# EAGLE board espduino (EAGLE 7.1.0)
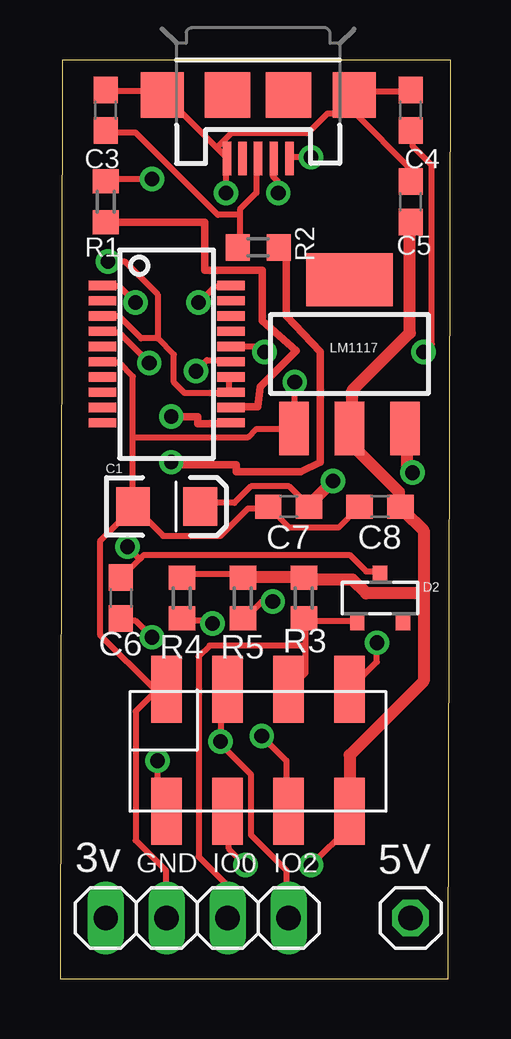
[diagram p0: board, top side]
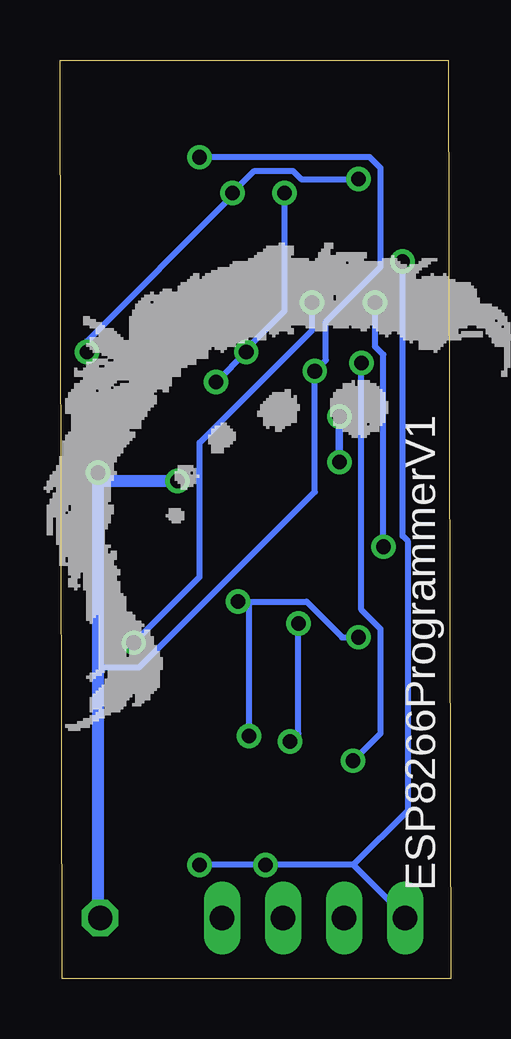
[diagram p1: board, bottom side, seen from below]

Size 16.28 x 38.29 mm. Coordinates in mm from the lower left corner, seen from the top.
Outline: 0,0 16.18,0 16.28,38.29 0.1,38.29 0,0
Copper layers (1*16): Top 0.035mm / dielectric 1.5mm / Bottom 0.035mm
Design rules "default *": minimum track width 10mil, minimum drill 15mil, track to track 8mil, track to pad 8mil, pad to pad 8mil, via to via 8mil, smd to smd 8mil, copper to edge 20mil, drill to drill 7mil, minimum pad ring 10mil, minimum via ring 8mil, stop-mask expansion 4mil, vias tented up to drill 0mil, thermal gap 10mil
Net classes: 1 POWER: width 0.508 mm

## Footprints (pad centres in the part's own frame; a part is rotated, then mirrored left to right if it is on the bottom)
1X01 = drill 1.016 octagon: 1 0,0
EIA3216 = smd 1.4 x 1.6: A 1.4,0; C -1.4,0
C0603 = smd 1.1 x 1: 1 -0.85,0; 2 0.85,0
SOT23-R = smd 0.6 x 0.7: 1 -0.95,-1; 2 0.95,-1; 3 0,1
1X04 = drill 1.016 long: 1 -3.81,0; 2 -1.27,0; 3 1.27,0; 4 3.81,0
SOT223 = smd 1.219 x 2.235: 1 -2.311,-3.099; 2 0,-3.099; 3 2.311,-3.099 | smd 3.6 x 2.2: 4 0,3.099
R0603 = smd 1 x 1.1: 1 -0.85,0; 2 0.85,0
SSOP20_L = smd 0.381 x 1.143: 1 -2.857,-2.68; 2 -2.223,-2.68; 3 -1.587,-2.68; 4 -0.953,-2.68; 5 -0.318,-2.68; 6 0.318,-2.68; 7 0.953,-2.68; 8 1.587,-2.68; 9 2.223,-2.68; 10 2.857,-2.68; 11 2.857,2.68; 12 2.223,2.68; 13 1.587,2.68; 14 0.953,2.68; 15 0.318,2.68; 16 -0.318,2.68; 17 -0.953,2.68; 18 -1.587,2.68; 19 -2.223,2.68; 20 -2.857,2.68
ESP8266-01-HD = smd 1.27 x 2.794: CH_PD 3.81,0; GND 1.27,5.08; GPIO0 6.35,5.08; GPIO2 3.81,5.08; RST 6.35,0; RXD 8.89,5.08; TXD 1.27,0; VCC 8.89,0
USB-MICROB = smd 0.35 x 1.4: D+ 0,2.65; D- -0.65,2.65; GND 1.3,2.65; ID 0.65,2.65; VBUS -1.3,2.65 | smd 1.8 x 1.9: MT1 -4,0; MT2 4,0 | smd 1.9 x 1.9: P$1 -1.27,0; P$2 1.27,0

## Placement (x,y rotation side)
5V  [1X01]  14.61,2.54 0 top
C1  10uF  [EIA3216]  4.45,19.69 0 top
C3  47pF  [C0603]  1.91,36.2 90 top
C4  47pF  [C0603]  14.61,36.2 90 top
C5  0.1uF  [C0603]  14.61,32.38 90 top
C6  0.1uf  [C0603]  2.54,15.88 90 top
C7  0.1uf  [C0603]  9.53,19.69 180 top
C8  0.1uf  [C0603]  13.33,19.69 180 top
D2  [SOT23-R]  13.33,15.88 0 top
ESP8266  [1X04]  5.71,2.54 0 top
LM1117  [SOT223]  12.06,26.04 0 top
R1  27  [R0603]  1.91,32.38 270 top
R2  27  [R0603]  8.26,30.48 180 top
R3  100k  [R0603]  10.16,15.88 90 top
R4  100k  [R0603]  5.08,15.88 90 top
R5  10k  [R0603]  7.62,15.88 90 top
U1  FT231XS  [SSOP20_L]  4.45,26.04 270 top
U$1  ESP8266HEADERS  [ESP8266-01-HD]  3.17,6.98 0 top
U$2  [JUMPER-LOGO]  10.79,23.5 0 top
X1  USB-MICROB  [USB-MICROB]  8.26,36.83 180 top

## Library data of the parts
5V ESP8266 = pinhead
C1 = SparkFun-Passives
C3-C8 R1-R5 = resistor
D2 = adafruit
LM1117 = SparkFun-PowerIC; PROD_ID: VREG-08170
U1 = SparkFun-DigitalIC
U$1 U$2 = jumper-parts
X1 = SparkFun-Connectors; PROD_ID: CONN-09505

## Nets
3.3V: C5.1 C8.1 ESP8266.1 LM1117.2 R3.2 R4.2 R5.2 U1.3 U1.13 U1.14 U$1.CH_PD U$1.VCC
5V: 5V.1 C1.A C7.1 LM1117.3 U1.15 X1.VBUS
CBUS0: U1.18
CBUS3: U1.19
CTS: U1.9
DCD: U1.8
DSR: U1.7
DTR: C6.2 D2.3 U1.1
GND: C1.C C3.2 C4.2 C5.2 C7.2 C8.2 ESP8266.2 LM1117.1 U1.6 U1.16 U$1.GND X1.GND X1.MT1 X1.MT2
GPIO0: D2.1 ESP8266.3 R3.1 U$1.GPIO0
GPIO2: ESP8266.4 R4.1 U$1.GPIO2
N$1: R1.2 U1.12
N$2: R2.1 U1.11
N$3: C3.1 R2.2 X1.D+
N$4: C4.1 R1.1 X1.D-
RESET: C6.1 R5.1 U$1.RST
RI: U1.5
RTS: U1.2
RXD: U1.20 U$1.RXD
TXD: U1.4 U$1.TXD

## Tracks (layer width: path | path; a pad name or v marks a point on that pad's centre or on a via)
3.3V  (via drill 0.61)
  Top 0.254: 7.04,24.41 7.04,25.1 U1.14 | 4.06,26.7 3.38,26.7 2.46,27.61 1.78,27.61 U1.3 | 4.06,26.7 4.75,26.01 4.75,24.87 5.21,24.41 7.04,24.41 | 7.04,24.41 U1.13 | R4.2 5.21,16.87 7.49,16.87 R5.2 | U$1.VCC 12.06,6.35 v10.46,4.75 | v7.72,4.75 7.04,5.44 7.04,6.81 U$1.CH_PD | 4.06,26.7 4.06,28.52 2.69,29.9 v2.01,29.9
  Top 0.508: R5.2 7.84,16.75 10.12,16.75 R3.2 10.35,16.64 12.18,16.64 12.75,16.07 15.15,16.07 | 14.24,19.72 C8.1 | C8.1 14.12,19.95 14.12,20.3 12.06,22.35 LM1117.2 12.18,23.15 12.18,24.52 14.58,26.92 14.58,31.5 C5.1 | U$1.VCC 12.06,9.32 15.15,12.41 15.15,16.07 | 15.15,16.07 15.15,18.69 14.35,19.5 C8.1
  Bottom 0.254: 4.06,4.75 v7.72,4.75 v10.46,4.75 | 4.06,4.75 2.01,2.69 ESP8266.1 | v2.01,29.9 2.01,18.47 1.78,18.24 1.78,7.04 4.06,4.75
5V  (via drill 0.61)
  Top 0.254: v5.66,25.32 6.12,25.78 7.04,25.78 U1.15 | v10.46,34.24 9.55,34.24 X1.VBUS | C1.A 5.89,19.84 7.26,19.84 7.95,20.52 9.55,20.52 10.24,19.84 C7.1
  Top 0.508: 10.46,19.72 C7.1 10.58,19.95 v11.38,20.75 | v14.69,21.1 14.46,21.32 14.46,22.92 LM1117.3
  Bottom 0.254: 14.69,12.98 12.98,12.98 5.66,20.3 v5.66,25.32 5.21,25.78 5.21,27.38 2.92,29.67 2.92,33.78 3.38,34.24 v10.46,34.24
  Bottom 0.508: 5V.1 14.69,2.58 14.69,12.98 v14.69,21.1 14.46,20.75 v11.38,20.75
DTR  (via drill 0.61)
  Top 0.254: 3.32,17.49 2.58,16.75 C6.2 | 3.32,17.49 3.49,17.67 12.06,17.67 12.75,16.98 13.32,16.98 D2.3 | v3.15,28.18 2.46,28.87 1.78,28.87 U1.1 | 3.32,17.49 v2.81,18.01
  Bottom 0.254: v3.15,28.18 3.15,26.35 2.81,26.01 v2.81,18.01
GND  (via drill 0.61)
  Top 0.254: C5.2 14.58,33.32 14.58,33.78 12.29,36.07 12.29,36.75 X1.MT1 | C4.2 14.58,36.98 12.64,36.98 12.41,36.75 X1.MT1 | C3.2 2.01,36.98 4.06,36.98 4.18,36.87 X1.MT2 4.29,36.87 6.52,34.64 | 6.52,34.64 6.92,34.24 X1.GND 6.92,34.12 v6.92,32.75 | 6.52,34.64 7.15,35.27 10.35,35.27 11.15,36.07 12.18,36.07 X1.MT1 | U1.16 8.29,26.35 v8.52,26.12 | v9.78,24.87 9.78,23.04 LM1117.1 9.66,22.92 8.18,22.92 7.84,22.58 3.04,22.58 | C8.2 12.41,19.61 11.61,18.81 9.55,18.81 8.75,19.61 C7.2 8.64,19.61 7.84,19.61 6.69,18.47 4.29,18.47 3.15,19.61 C1.C | 3.04,22.58 3.04,19.72 C1.C | 3.04,22.58 3.04,25.1 2.46,25.67 1.78,25.67 U1.6 | C1.C 3.04,19.61 1.66,18.24 1.66,14.35 3.95,12.06 U$1.GND 3.95,11.95 3.15,11.15 3.15,5.78 4.41,4.52 4.41,2.58 ESP8266.2
  Bottom 0.254: v9.78,24.87 v8.52,26.12 8.52,26.24 6.92,27.84 v6.92,32.75
GPIO0
  Top 0.254: D2.1 12.29,14.92 10.24,14.92 R3.1 10.24,14.81 10.24,13.89 | 10.24,13.89 10.24,12.75 9.55,12.06 U$1.GPIO0 | 10.24,13.89 6.24,13.89 5.78,13.44 5.78,5.09 6.92,3.95 6.92,2.58 ESP8266.3
GPIO2  (via drill 0.61)
  Top 0.254: v6.35,14.81 6.24,14.92 5.09,14.92 R4.1 | U$1.GPIO2 6.92,12.06 6.69,11.84 v6.69,9.89 6.69,9.78 7.95,8.52 7.95,6.01 9.44,4.52 9.44,2.58 ESP8266.4
  Bottom 0.254: v6.35,14.81 6.35,10.24 v6.69,9.89
N$1
  Top 0.305: R1.2 6.04,31.54 6.04,29.54 8.44,29.54 8.44,27.44 9.83,26.19 8.34,24.69 8.23,23.84 7.12,23.84 U1.12
N$2  (via drill 0.6)
  Top 0.305: R2.1 9.44,30.48 9.44,27.64 10.83,26.14 10.83,21.54 10.04,21.14 7.33,21.14 7.33,21.44 4.63,21.44 v4.63,21.54 | v4.63,23.44 5.73,23.44 5.73,23.14 7.12,23.14 U1.11
  Bottom 0.305: v4.63,21.54 v4.63,23.44
N$3
  Top 0.254: 7.49,31.84 7.49,32.07 8.18,32.75 8.18,34.12 X1.D+ | 7.49,31.84 7.49,30.58 R2.2 | 7.49,31.84 6.58,31.84 3.15,35.27 2.01,35.27 C3.1
N$4  (via drill 0.61)
  Top 0.254: v3.83,33.32 2.01,33.32 R1.1 | v9.09,32.75 9.09,33.21 8.87,33.44 8.87,34.12 X1.D- | v15.15,26.12 15.49,26.47 15.49,33.9 14.69,34.7 14.69,35.27 C4.1
  Bottom 0.254: v3.83,33.32 6.24,33.32 6.58,33.67 8.18,33.67 v9.09,32.75 9.09,32.64 15.15,26.58 v15.15,26.12
RESET  (via drill 0.61)
  Top 0.254: v3.83,14.24 3.15,14.92 2.58,14.92 C6.1 | v8.87,15.72 8.41,15.72 7.72,15.04 R5.1 | v8.41,10.12 9.44,9.09 9.44,7.04 U$1.RST
  Bottom 0.254: v3.83,14.24 4.52,14.24 6.01,15.72 v8.87,15.72 8.41,15.61 v8.41,10.12
RXD  (via drill 0.61)
  Top 0.254: v5.78,28.18 6.46,28.87 7.04,28.87 U1.20 | v13.21,14.01 13.21,13.21 U$1.RXD
  Bottom 0.254: v5.78,28.18 5.78,27.04 10.46,22.35 10.46,16.75 v13.21,14.01
TXD  (via drill 0.61)
  Top 0.254: v3.72,25.67 2.46,26.92 1.78,26.92 U1.4 | v4.06,9.09 4.06,7.38 4.41,7.04 U$1.TXD
  Bottom 0.254: v3.72,25.67 3.72,15.38 2.92,14.58 2.92,10.24 v4.06,9.09

## Text on the board
tNames: 3v | GND | IO0 | IO2
bNames: ESP8266ProgrammerV1